# EAGLE board The_QwiicNES-Panel (EAGLE 9.6.2), part 1 of 2
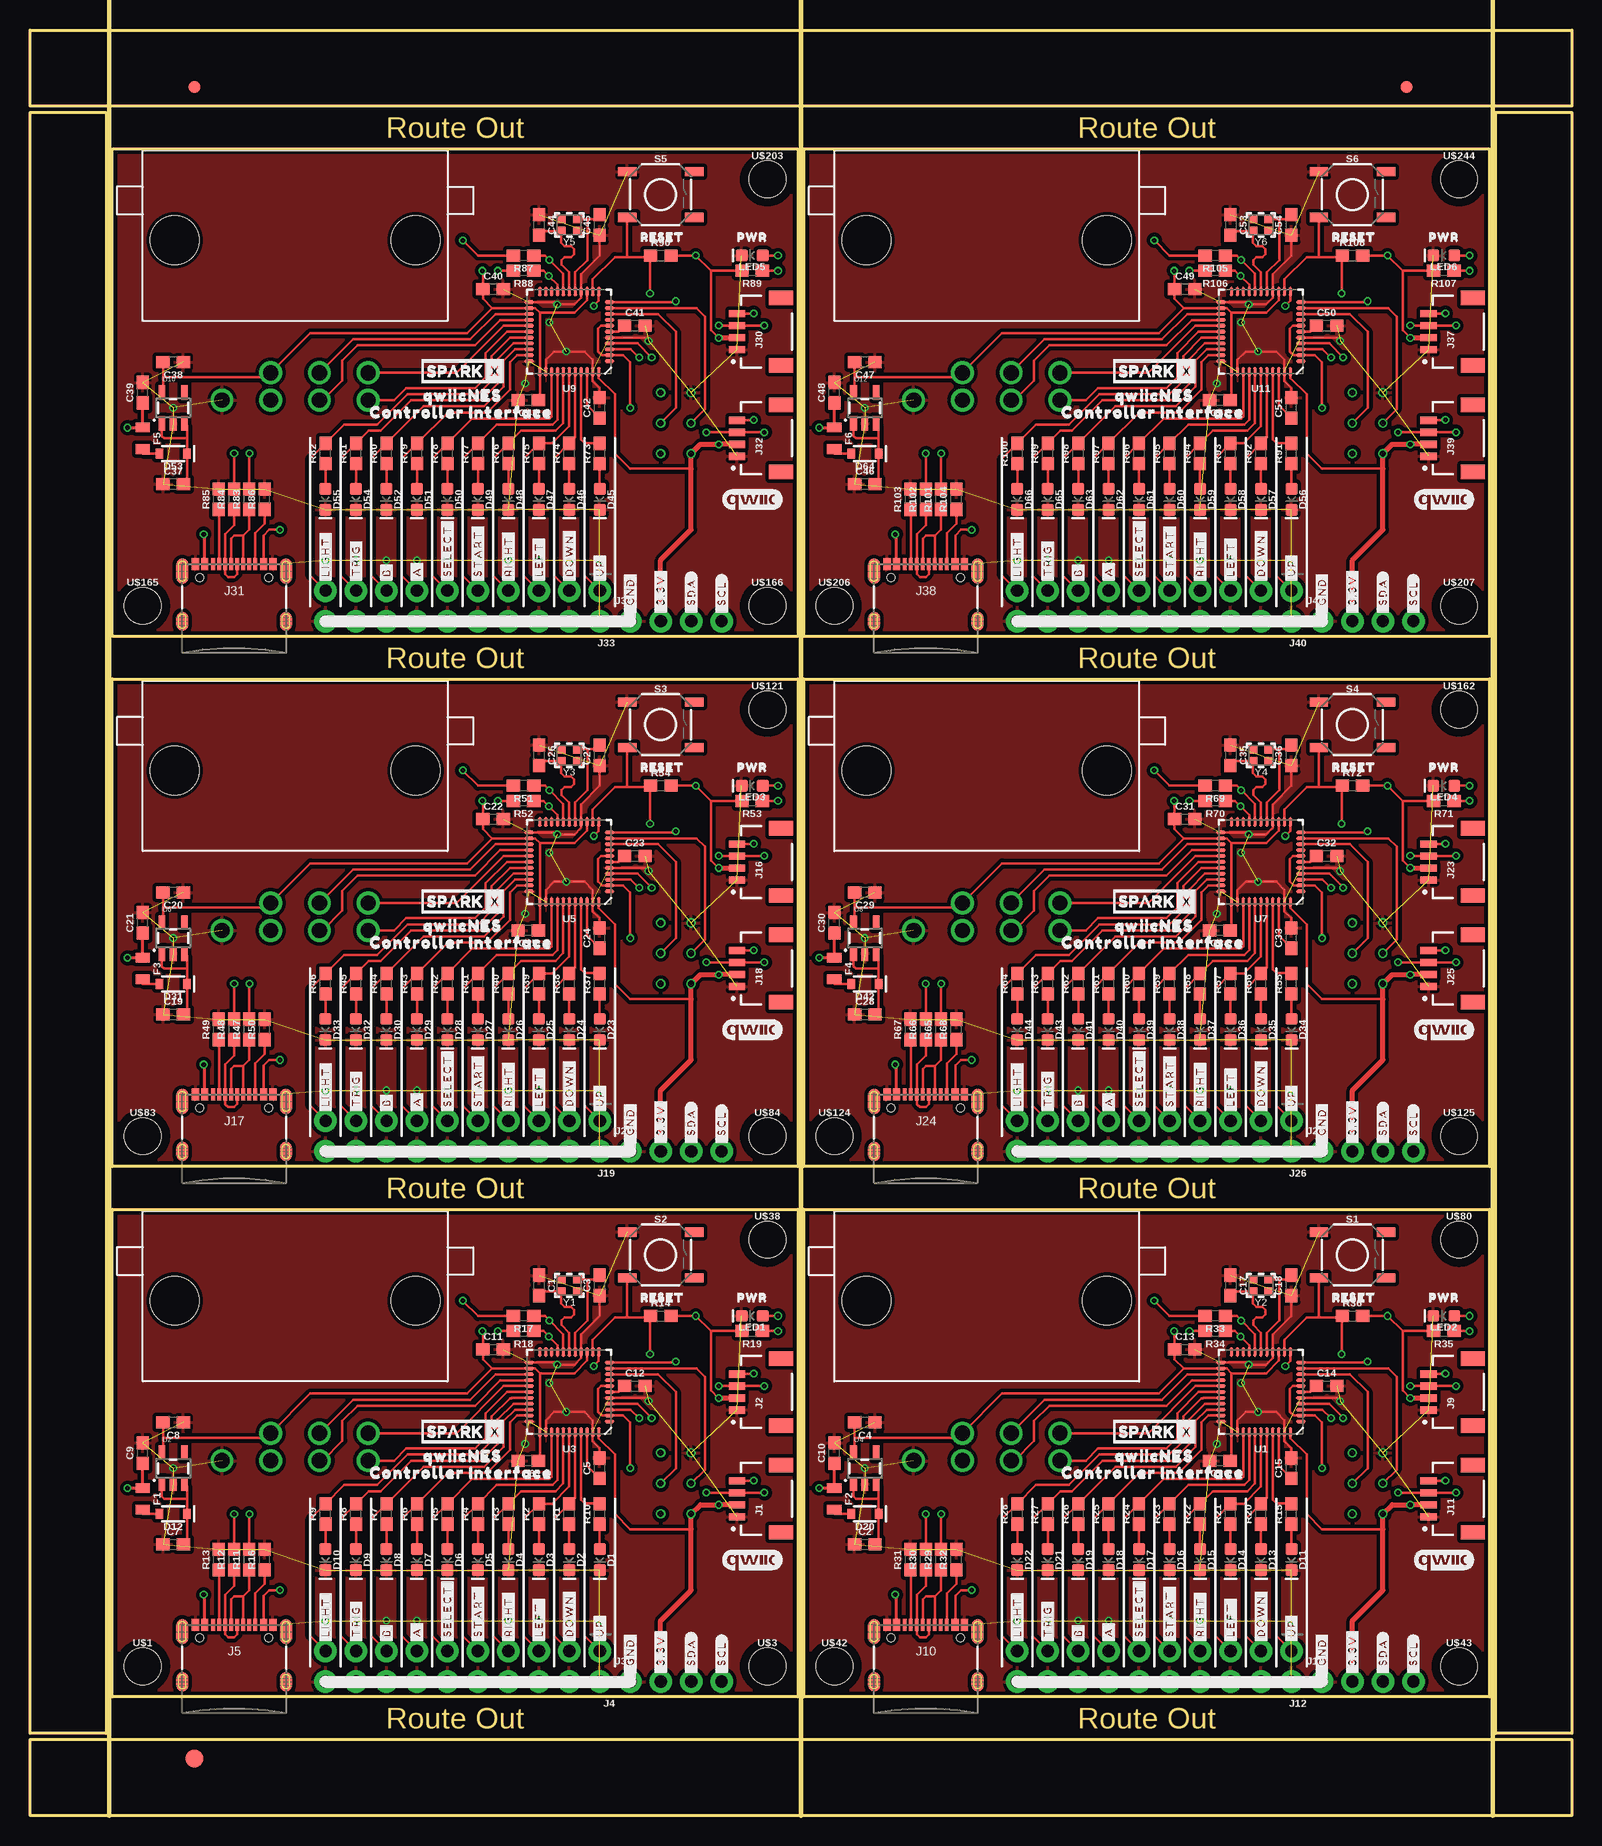
[diagram p0: board, top side]
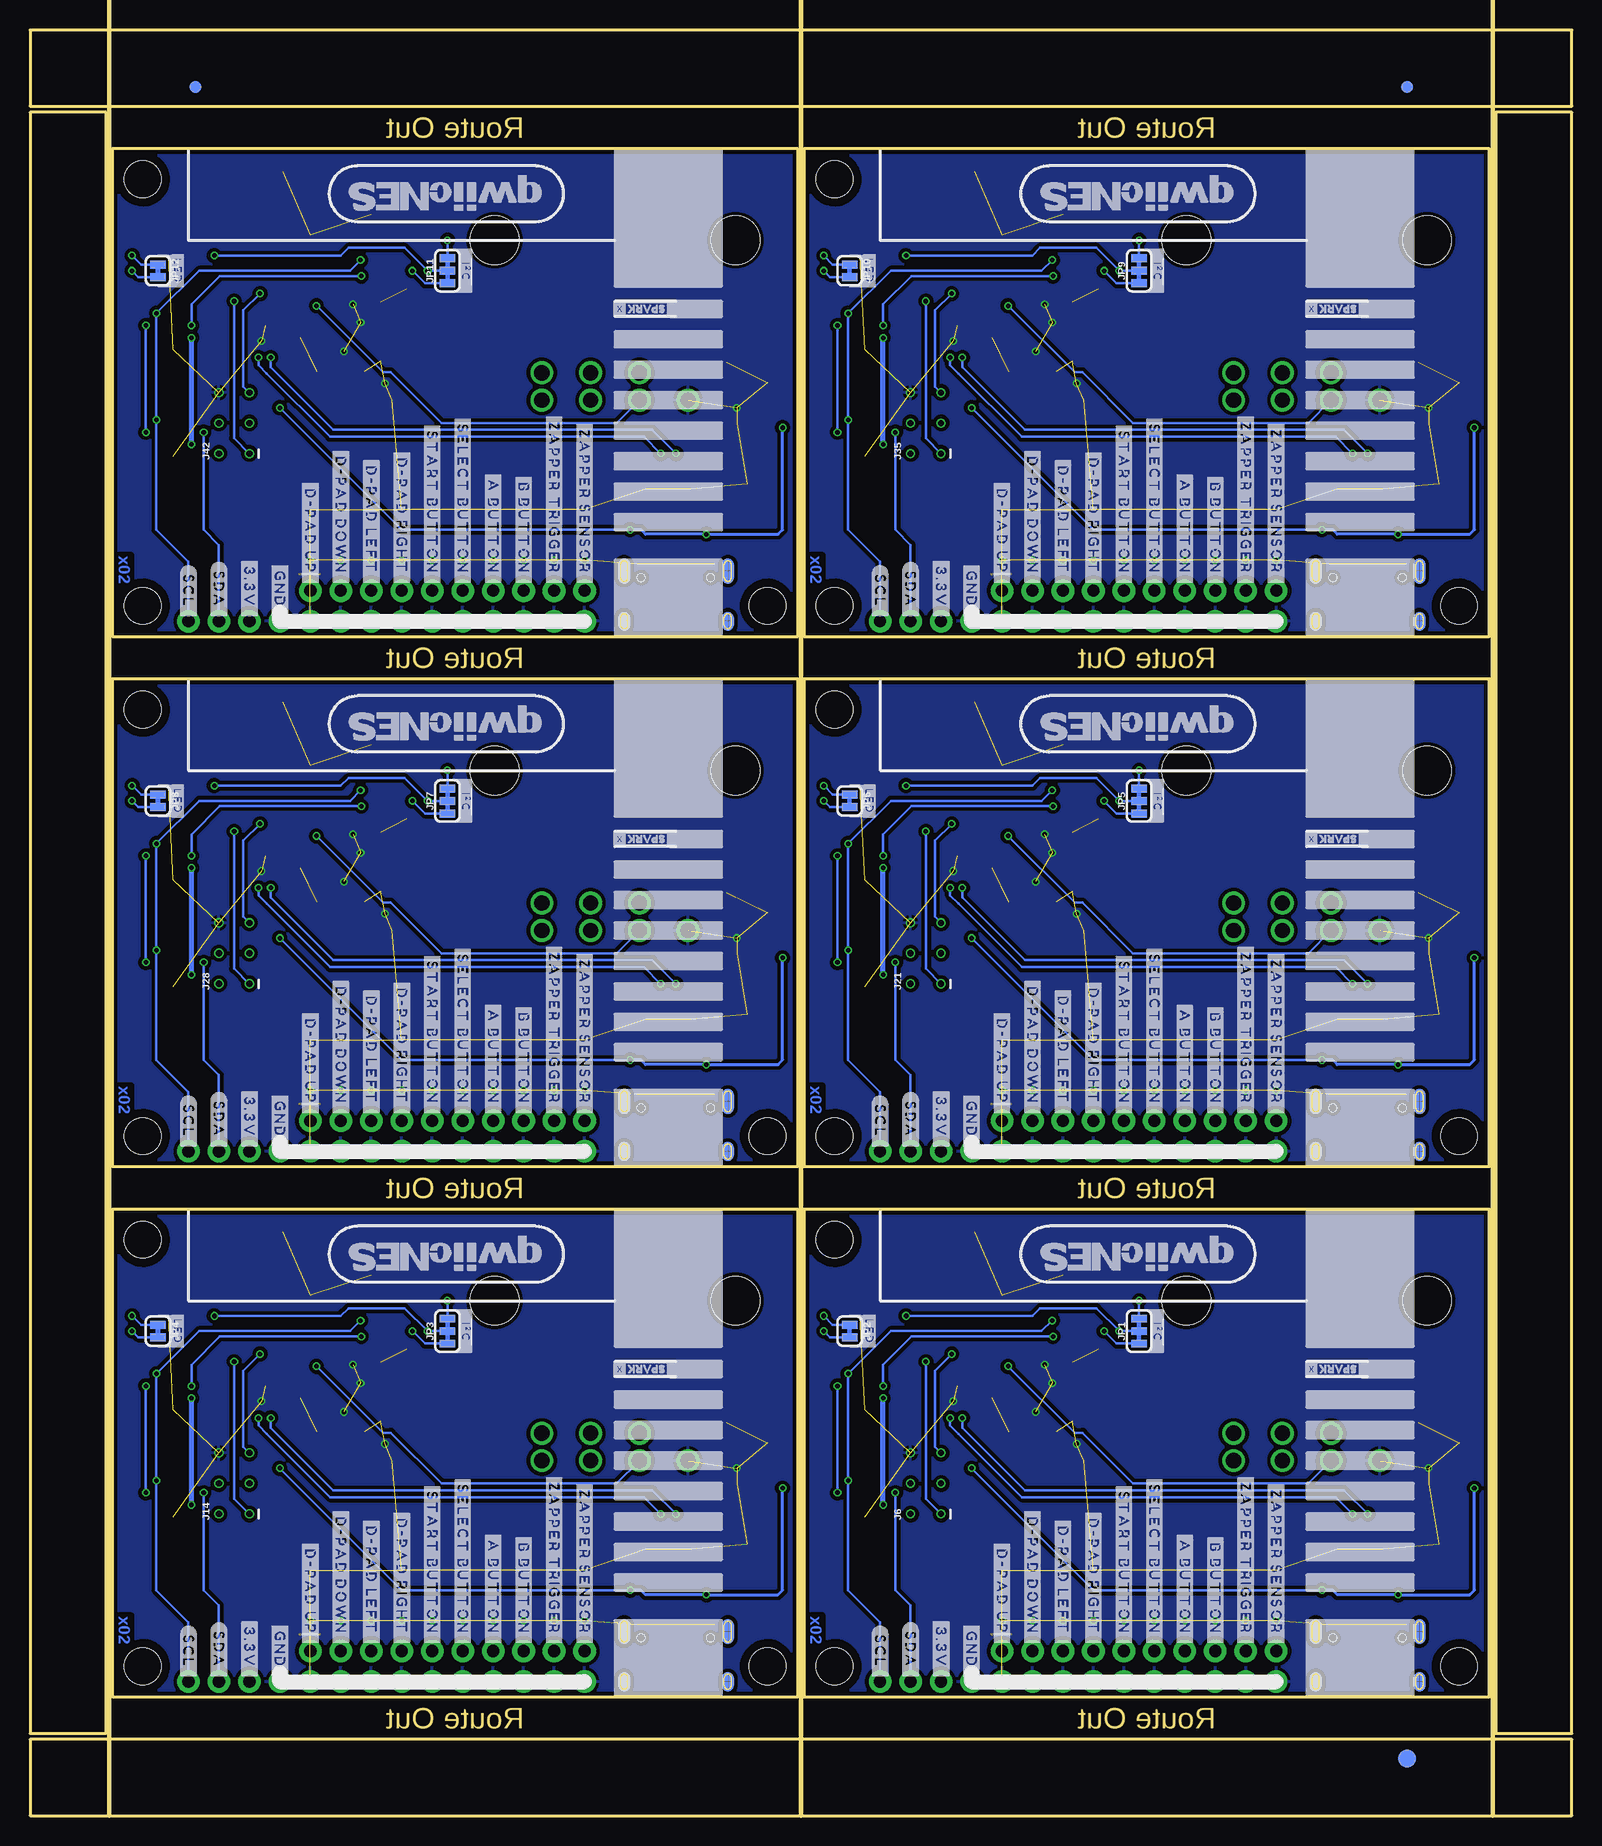
[diagram p1: board, bottom side, seen from below]

Size 128.52 x 148.84 mm. Coordinates in mm from the lower left corner, seen from the top.
Outline: 6.86,9.91 6.86,50.55 64.01,50.55 64.01,9.91 6.86,9.91
Outline: 64.52,9.91 64.52,50.55 121.67,50.55 121.67,9.91 64.52,9.91
Outline: 6.86,54.1 6.86,94.74 64.01,94.74 64.01,54.1 6.86,54.1
Outline: 64.52,54.1 64.52,94.74 121.67,94.74 121.67,54.1 64.52,54.1
Outline: 6.86,98.3 6.86,138.94 64.01,138.94 64.01,98.3 6.86,98.3
Outline: 64.52,98.3 64.52,138.94 121.67,138.94 121.67,98.3 64.52,98.3
Outline: 0,6.35 128.52,6.35 128.52,0 0,0 0,6.35
Outline: 122.17,141.99 128.52,141.99 128.52,6.86 122.17,6.86 122.17,141.99
Outline: 0,148.84 128.52,148.84 128.52,142.49 0,142.49 0,148.84
Outline: 0,141.99 6.35,141.99 6.35,6.86 0,6.86 0,141.99
Copper layers (1*16): Top 0.035mm / dielectric 1.5mm / Bottom 0.035mm
Design rules "The_QwiicNES": minimum track width 5mil, minimum drill 0.3mm, track to track 5mil, track to pad 5mil, pad to pad 5mil, via to via 5mil, smd to smd 5mil, copper to edge 7mil, drill to drill 7mil, minimum pad ring 5mil, minimum via ring 5mil, stop-mask expansion 4mil, vias tented up to drill 25mil, thermal gap 10mil
Net classes: 0 default: width 0 mm, drill 0 mm
Milling: 3 lines

## Footprints (pad centres in the part's own frame; a part is rotated, then mirrored left to right if it is on the bottom)
0603 = smd 1.1 x 1: 1 -0.85,0; 2 0.85,0
LED-0603 = smd 1 x 1: A -0.877,0; C 0.877,0
SOD-323 = smd 0.63 x 0.83: A 1.15,0; C -1.15,0
FIDUCIAL-1X2 = smd 1 x 1: 1 0,0
FIDUCIAL-1.5X3 = smd 1.5 x 1.5: 1 0,0
0805 = smd 0.8 x 1.2: 1 -0.9,0; 2 0.9,0
JST04_1MM_RA = smd 0.6 x 1.35: 1 -1.5,0; 2 -0.5,0; 3 0.5,0; 4 1.5,0 | smd 1.2 x 2: NC1 2.8,-3.675; NC2 -2.8,-3.675
1X04_NO_SILK = drill 1.016 pad 1.88: 1 0,0; 2 2.54,0; 3 5.08,0; 4 7.62,0
2X10_NOSILK = drill 1.016 pad 1.88: 1 0,0; 2 0,2.54; 3 2.54,0; 4 2.54,2.54; 5 5.08,0; 6 5.08,2.54; 7 7.62,0; 8 7.62,2.54; 9 10.16,0; 10 10.16,2.54; 11 12.7,0; 12 12.7,2.54; 13 15.24,0; 14 15.24,2.54; 15 17.78,0; 16 17.78,2.54; 17 20.32,0; 18 20.32,2.54; 19 22.86,0; 20 22.86,2.54
USB-C-16P-5 = smd 0.3 x 1: A5 -1.25,-0.34; A6 -0.25,-0.34; A7 0.25,-0.34; A8 1.25,-0.34; B5 1.75,-0.34; B6 0.75,-0.34; B7 -0.75,-0.34; B8 -1.75,-0.34 | smd 0.6 x 1: GND -3.225,-0.34; GND2 3.225,-0.34; VBUS1 -2.45,-0.34; VBUS2 2.45,-0.34 | smd 1 x 2.1: SHLD1 -4.32,-0.915; SHLD2 4.32,-0.915 | smd 1 x 2.1 bottom: SHLD3 -4.32,-0.915; SHLD4 4.32,-0.915 | smd 1 x 1.6: SHLD5 -4.32,-5.095; SHLD8 4.32,-5.095 | smd 1 x 1.6 bottom: SHLD6 -4.32,-5.095; SHLD7 4.32,-5.095 | hole 0.65: -2.89,-1.445; 2.89,-1.445
2X3_TEST_POINTS = drill 0.508: 1 -2.54,-1.27; 2 -2.54,1.27; 3 0,-1.27; 4 0,1.27; 5 2.54,-1.27; 6 2.54,1.27
NES_CONTROLLER_PORT_7PIN_90 = drill 1.27: 1 -6.096,-13.335; 2 -2.032,-13.335; 3 2.032,-13.335; 4 6.096,-13.335; 5 6.096,-11.049; 6 2.032,-11.049; 7 -2.032,-11.049 | hole 4.064: -10.033,0; 10.033,0
SMT-JUMPER_3_2-NC_TRACE_SILK = smd 0.66 x 1.27: 1 -1.041,0; 2 0,0; 3 1.041,0
SMT-JUMPER_2_NC_TRACE_SILK = smd 0.66 x 1.27: 1 -0.521,0; 2 0.521,0
TACTILE_SWITCH_SMD_5.2MM = smd 1.524 x 0.762: 1 -2.794,1.905; 2 2.794,1.905; 3 -2.794,-1.905; 4 2.794,-1.905
QFN-44-NOPAD_1:1-LESS_PASTE = smd 0.8 x 0.3: 1 -3.337,2.458; 2 -3.337,1.958; 3 -3.337,1.479; 4 -3.337,0.979; 5 -3.337,0.5; 6 -3.337,0; 7 -3.337,-0.5; 8 -3.337,-0.979; 9 -3.337,-1.479; 10 -3.337,-1.958; 11 -3.337,-2.458; 23 3.337,-2.458; 24 3.337,-1.958; 25 3.337,-1.479; 26 3.337,-0.979; 27 3.337,-0.5; 28 3.337,0; 29 3.337,0.5; 30 3.337,0.979; 31 3.337,1.479; 32 3.337,1.958; 33 3.337,2.458 | smd 0.3 x 0.8: 12 -2.458,-3.337; 13 -1.958,-3.337; 14 -1.479,-3.337; 15 -0.979,-3.337; 16 -0.5,-3.337; 17 0,-3.337; 18 0.5,-3.337; 19 0.979,-3.337; 20 1.479,-3.337; 21 1.958,-3.337; 22 2.458,-3.337; 34 2.458,3.337; 35 1.958,3.337; 36 1.479,3.337; 37 0.979,3.337; 38 0.5,3.337; 39 0,3.337; 40 -0.5,3.337; 41 -0.979,3.337; 42 -1.479,3.337; 43 -1.958,3.337; 44 -2.458,3.337
SOT23-5 = smd 0.55 x 1.2: 1 -0.95,-1.3; 2 0,-1.3; 3 0.95,-1.3; 4 0.95,1.3; 5 -0.95,1.3
STAND-OFF-TIGHT = hole 3.048: 0,0
CRYSTAL-SMD-2.0X1.6MM = smd 0.75 x 0.7: 1 -0.675,-0.5; 2 0.675,-0.5; 3 0.675,0.5; 4 -0.675,0.5

## Placement (x,y rotation side)
C1  22pF  [0603]  42.42,44.2 270 top
C2  10uF  [0603]  69.6,22.61 0 top
C3  22pF  [0603]  47.5,44.2 90 top
C4  10uF  [0603]  69.6,32.77 180 top
C5  0.1uF  [0603]  47.5,28.96 90 top
C6  0.1uF  [0603]  41.53,29.59 180 top
C7  10uF  [0603]  11.94,22.61 0 top
C8  10uF  [0603]  11.94,32.77 180 top
C9  1.0uF  [0603]  9.4,30.23 90 top
C10  1.0uF  [0603]  67.06,30.23 90 top
C11  1.0uF  [0603]  38.61,38.86 0 top
C12  1.0uF  [0603]  50.42,35.81 0 top
C13  1.0uF  [0603]  96.27,38.86 0 top
C14  1.0uF  [0603]  108.08,35.81 0 top
C15  0.1uF  [0603]  105.16,28.96 90 top
C16  0.1uF  [0603]  99.19,29.59 180 top
C17  22pF  [0603]  100.08,44.2 270 top
C18  22pF  [0603]  105.16,44.2 90 top
C19  10uF  [0603]  11.94,66.8 0 top
C20  10uF  [0603]  11.94,76.96 180 top
C21  1.0uF  [0603]  9.4,74.42 90 top
C22  1.0uF  [0603]  38.61,83.06 0 top
C23  1.0uF  [0603]  50.42,80.01 0 top
C24  0.1uF  [0603]  47.5,73.15 90 top
C25  0.1uF  [0603]  41.53,73.79 180 top
C26  22pF  [0603]  42.42,88.39 270 top
C27  22pF  [0603]  47.5,88.39 90 top
C28  10uF  [0603]  69.6,66.8 0 top
C29  10uF  [0603]  69.6,76.96 180 top
C30  1.0uF  [0603]  67.06,74.42 90 top
C31  1.0uF  [0603]  96.27,83.06 0 top
C32  1.0uF  [0603]  108.08,80.01 0 top
C33  0.1uF  [0603]  105.16,73.15 90 top
C34  0.1uF  [0603]  99.19,73.79 180 top
C35  22pF  [0603]  100.08,88.39 270 top
C36  22pF  [0603]  105.16,88.39 90 top
C37  10uF  [0603]  11.94,111 0 top
C38  10uF  [0603]  11.94,121.16 180 top
C39  1.0uF  [0603]  9.4,118.62 90 top
C40  1.0uF  [0603]  38.61,127.25 0 top
C41  1.0uF  [0603]  50.42,124.21 0 top
C42  0.1uF  [0603]  47.5,117.35 90 top
C43  0.1uF  [0603]  41.53,117.98 180 top
C44  22pF  [0603]  42.42,132.59 270 top
C45  22pF  [0603]  47.5,132.59 90 top
C46  10uF  [0603]  69.6,111 0 top
C47  10uF  [0603]  69.6,121.16 180 top
C48  1.0uF  [0603]  67.06,118.62 90 top
C49  1.0uF  [0603]  96.27,127.25 0 top
C50  1.0uF  [0603]  108.08,124.21 0 top
C51  0.1uF  [0603]  105.16,117.35 90 top
C52  0.1uF  [0603]  99.19,117.98 180 top
C53  22pF  [0603]  100.08,132.59 270 top
C54  22pF  [0603]  105.16,132.59 90 top
D1  GREEN  [LED-0603]  47.5,21.34 270 top
D2  GREEN  [LED-0603]  44.96,21.34 270 top
D3  GREEN  [LED-0603]  42.42,21.34 270 top
D4  GREEN  [LED-0603]  39.88,21.34 270 top
D5  GREEN  [LED-0603]  37.34,21.34 270 top
D6  GREEN  [LED-0603]  34.8,21.34 270 top
D7  GREEN  [LED-0603]  32.26,21.34 270 top
D8  GREEN  [LED-0603]  29.72,21.34 270 top
D9  GREEN  [LED-0603]  27.18,21.34 270 top
D10  GREEN  [LED-0603]  24.64,21.34 270 top
D11  GREEN  [LED-0603]  105.16,21.34 270 top
D12  3A/10V/280mV  [SOD-323]  11.94,25.15 180 top
D13  GREEN  [LED-0603]  102.62,21.34 270 top
D14  GREEN  [LED-0603]  100.08,21.34 270 top
D15  GREEN  [LED-0603]  97.54,21.34 270 top
D16  GREEN  [LED-0603]  95,21.34 270 top
D17  GREEN  [LED-0603]  92.46,21.34 270 top
D18  GREEN  [LED-0603]  89.92,21.34 270 top
D19  GREEN  [LED-0603]  87.38,21.34 270 top
D20  3A/10V/280mV  [SOD-323]  69.6,25.15 180 top
D21  GREEN  [LED-0603]  84.84,21.34 270 top
D22  GREEN  [LED-0603]  82.3,21.34 270 top
D23  GREEN  [LED-0603]  47.5,65.53 270 top
D24  GREEN  [LED-0603]  44.96,65.53 270 top
D25  GREEN  [LED-0603]  42.42,65.53 270 top
D26  GREEN  [LED-0603]  39.88,65.53 270 top
D27  GREEN  [LED-0603]  37.34,65.53 270 top
D28  GREEN  [LED-0603]  34.8,65.53 270 top
D29  GREEN  [LED-0603]  32.26,65.53 270 top
D30  GREEN  [LED-0603]  29.72,65.53 270 top
D31  3A/10V/280mV  [SOD-323]  11.94,69.34 180 top
D32  GREEN  [LED-0603]  27.18,65.53 270 top
D33  GREEN  [LED-0603]  24.64,65.53 270 top
D34  GREEN  [LED-0603]  105.16,65.53 270 top
D35  GREEN  [LED-0603]  102.62,65.53 270 top
D36  GREEN  [LED-0603]  100.08,65.53 270 top
D37  GREEN  [LED-0603]  97.54,65.53 270 top
D38  GREEN  [LED-0603]  95,65.53 270 top
D39  GREEN  [LED-0603]  92.46,65.53 270 top
D40  GREEN  [LED-0603]  89.92,65.53 270 top
D41  GREEN  [LED-0603]  87.38,65.53 270 top
D42  3A/10V/280mV  [SOD-323]  69.6,69.34 180 top
D43  GREEN  [LED-0603]  84.84,65.53 270 top
D44  GREEN  [LED-0603]  82.3,65.53 270 top
D45  GREEN  [LED-0603]  47.5,109.73 270 top
D46  GREEN  [LED-0603]  44.96,109.73 270 top
D47  GREEN  [LED-0603]  42.42,109.73 270 top
D48  GREEN  [LED-0603]  39.88,109.73 270 top
D49  GREEN  [LED-0603]  37.34,109.73 270 top
D50  GREEN  [LED-0603]  34.8,109.73 270 top
D51  GREEN  [LED-0603]  32.26,109.73 270 top
D52  GREEN  [LED-0603]  29.72,109.73 270 top
D53  3A/10V/280mV  [SOD-323]  11.94,113.54 180 top
D54  GREEN  [LED-0603]  27.18,109.73 270 top
D55  GREEN  [LED-0603]  24.64,109.73 270 top
D56  GREEN  [LED-0603]  105.16,109.73 270 top
D57  GREEN  [LED-0603]  102.62,109.73 270 top
D58  GREEN  [LED-0603]  100.08,109.73 270 top
D59  GREEN  [LED-0603]  97.54,109.73 270 top
D60  GREEN  [LED-0603]  95,109.73 270 top
D61  GREEN  [LED-0603]  92.46,109.73 270 top
D62  GREEN  [LED-0603]  89.92,109.73 270 top
D63  GREEN  [LED-0603]  87.38,109.73 270 top
D64  3A/10V/280mV  [SOD-323]  69.6,113.54 180 top
D65  GREEN  [LED-0603]  84.84,109.73 270 top
D66  GREEN  [LED-0603]  82.3,109.73 270 top
E$1  [FIDUCIAL-1X2]  13.72,144.08 0 top
E$2  [FIDUCIAL-1X2]  13.72,144.08 0 bottom
E$3  [FIDUCIAL-1X2]  114.74,144.08 0 top
E$4  [FIDUCIAL-1X2]  114.74,144.08 0 bottom
E$5  [FIDUCIAL-1.5X3]  13.72,4.76 0 top
E$6  [FIDUCIAL-1.5X3]  13.72,4.76 0 bottom
F1  6V 0.5A  [0805]  9.4,26.42 270 top
F2  6V 0.5A  [0805]  67.06,26.42 270 top
F3  6V 0.5A  [0805]  9.4,70.61 270 top
F4  6V 0.5A  [0805]  67.06,70.61 270 top
F5  6V 0.5A  [0805]  9.4,114.81 270 top
F6  6V 0.5A  [0805]  67.06,114.81 270 top
J1  QWIIC_RIGHT_ANGLE  [JST04_1MM_RA]  58.93,26.42 90 top
J2  QWIIC_RIGHT_ANGLE  [JST04_1MM_RA]  58.93,35.31 90 top
J3  [1X04_NO_SILK]  50.04,11.18 0 top
J4  [2X10_NOSILK]  47.5,13.72 180 top
J5  [USB-C-16P-5]  17.02,16.26 0 top
J6  AVR_SPI_PROG_3X2TESTPOINTS  [2X3_TEST_POINTS]  53.85,27.69 90 bottom
J7  NES_CONTROLLER_PORT  [NES_CONTROLLER_PORT_7PIN_90]  22.1,42.93 0 top
J8  NES_CONTROLLER_PORT  [NES_CONTROLLER_PORT_7PIN_90]  79.76,42.93 0 top
J9  QWIIC_RIGHT_ANGLE  [JST04_1MM_RA]  116.59,35.31 90 top
J10  [USB-C-16P-5]  74.68,16.26 0 top
J11  QWIIC_RIGHT_ANGLE  [JST04_1MM_RA]  116.59,26.42 90 top
J12  [2X10_NOSILK]  105.16,13.72 180 top
J13  [1X04_NO_SILK]  107.7,11.18 0 top
J14  AVR_SPI_PROG_3X2TESTPOINTS  [2X3_TEST_POINTS]  111.51,27.69 90 bottom
J15  NES_CONTROLLER_PORT  [NES_CONTROLLER_PORT_7PIN_90]  22.1,87.12 0 top
J16  QWIIC_RIGHT_ANGLE  [JST04_1MM_RA]  58.93,79.5 90 top
J17  [USB-C-16P-5]  17.02,60.45 0 top
J18  QWIIC_RIGHT_ANGLE  [JST04_1MM_RA]  58.93,70.61 90 top
J19  [2X10_NOSILK]  47.5,57.91 180 top
J20  [1X04_NO_SILK]  50.04,55.37 0 top
J21  AVR_SPI_PROG_3X2TESTPOINTS  [2X3_TEST_POINTS]  53.85,71.88 90 bottom
J22  NES_CONTROLLER_PORT  [NES_CONTROLLER_PORT_7PIN_90]  79.76,87.12 0 top
J23  QWIIC_RIGHT_ANGLE  [JST04_1MM_RA]  116.59,79.5 90 top
J24  [USB-C-16P-5]  74.68,60.45 0 top
J25  QWIIC_RIGHT_ANGLE  [JST04_1MM_RA]  116.59,70.61 90 top
J26  [2X10_NOSILK]  105.16,57.91 180 top
J27  [1X04_NO_SILK]  107.7,55.37 0 top
J28  AVR_SPI_PROG_3X2TESTPOINTS  [2X3_TEST_POINTS]  111.51,71.88 90 bottom
J29  NES_CONTROLLER_PORT  [NES_CONTROLLER_PORT_7PIN_90]  22.1,131.32 0 top
J30  QWIIC_RIGHT_ANGLE  [JST04_1MM_RA]  58.93,123.7 90 top
J31  [USB-C-16P-5]  17.02,104.65 0 top
J32  QWIIC_RIGHT_ANGLE  [JST04_1MM_RA]  58.93,114.81 90 top
J33  [2X10_NOSILK]  47.5,102.11 180 top
J34  [1X04_NO_SILK]  50.04,99.57 0 top
J35  AVR_SPI_PROG_3X2TESTPOINTS  [2X3_TEST_POINTS]  53.85,116.08 90 bottom
J36  NES_CONTROLLER_PORT  [NES_CONTROLLER_PORT_7PIN_90]  79.76,131.32 0 top
J37  QWIIC_RIGHT_ANGLE  [JST04_1MM_RA]  116.59,123.7 90 top
J38  [USB-C-16P-5]  74.68,104.65 0 top
J39  QWIIC_RIGHT_ANGLE  [JST04_1MM_RA]  116.59,114.81 90 top
J40  [2X10_NOSILK]  105.16,102.11 180 top
J41  [1X04_NO_SILK]  107.7,99.57 0 top
J42  AVR_SPI_PROG_3X2TESTPOINTS  [2X3_TEST_POINTS]  111.51,116.08 90 bottom
JP1  JUMPER-SMT_3_2-NC_TRACE_SILK  [SMT-JUMPER_3_2-NC_TRACE_SILK]  36.07,40.39 90 bottom
JP2  JUMPER-SMT_2_NC_TRACE_SILK  [SMT-JUMPER_2_NC_TRACE_SILK]  60.2,40.39 270 bottom
JP3  JUMPER-SMT_3_2-NC_TRACE_SILK  [SMT-JUMPER_3_2-NC_TRACE_SILK]  93.73,40.39 90 bottom
JP4  JUMPER-SMT_2_NC_TRACE_SILK  [SMT-JUMPER_2_NC_TRACE_SILK]  117.86,40.39 270 bottom
JP5  JUMPER-SMT_3_2-NC_TRACE_SILK  [SMT-JUMPER_3_2-NC_TRACE_SILK]  36.07,84.58 90 bottom
JP6  JUMPER-SMT_2_NC_TRACE_SILK  [SMT-JUMPER_2_NC_TRACE_SILK]  60.2,84.58 270 bottom
JP7  JUMPER-SMT_3_2-NC_TRACE_SILK  [SMT-JUMPER_3_2-NC_TRACE_SILK]  93.73,84.58 90 bottom
JP8  JUMPER-SMT_2_NC_TRACE_SILK  [SMT-JUMPER_2_NC_TRACE_SILK]  117.86,84.58 270 bottom
JP9  JUMPER-SMT_3_2-NC_TRACE_SILK  [SMT-JUMPER_3_2-NC_TRACE_SILK]  36.07,128.78 90 bottom
JP10  JUMPER-SMT_2_NC_TRACE_SILK  [SMT-JUMPER_2_NC_TRACE_SILK]  60.2,128.78 270 bottom
JP11  JUMPER-SMT_3_2-NC_TRACE_SILK  [SMT-JUMPER_3_2-NC_TRACE_SILK]  93.73,128.78 90 bottom
JP12  JUMPER-SMT_2_NC_TRACE_SILK  [SMT-JUMPER_2_NC_TRACE_SILK]  117.86,128.78 270 bottom
LED1  RED  [LED-0603]  60.2,41.66 180 top
LED2  RED  [LED-0603]  117.86,41.66 180 top
LED3  RED  [LED-0603]  60.2,85.85 180 top
LED4  RED  [LED-0603]  117.86,85.85 180 top
LED5  RED  [LED-0603]  60.2,130.05 180 top
LED6  RED  [LED-0603]  117.86,130.05 180 top
R1  1k  [0603]  44.96,25.15 90 top
R2  1k  [0603]  42.42,25.15 90 top
R3  1k  [0603]  39.88,25.15 90 top
R4  1k  [0603]  37.34,25.15 90 top
R5  1k  [0603]  34.8,25.15 90 top
R6  1k  [0603]  32.26,25.15 90 top
R7  1k  [0603]  29.72,25.15 90 top
R8  1k  [0603]  27.18,25.15 90 top
R9  1k  [0603]  24.64,25.15 90 top
R10  1k  [0603]  47.5,25.15 90 top
R11  22  [0603]  18.29,21.34 90 top
R12  22  [0603]  17.02,21.34 90 top
R13  5.1k  [0603]  15.75,21.34 90 top
R14  10k  [0603]  52.58,41.66 0 top
R15  1k  [0603]  105.16,25.15 90 top
R16  5.1k  [0603]  19.56,21.34 90 top
R17  2.2k  [0603]  41.15,41.66 180 top
R18  2.2k  [0603]  41.15,40.39 180 top
R19  1k  [0603]  60.2,40.39 180 top
R20  1k  [0603]  102.62,25.15 90 top
R21  1k  [0603]  100.08,25.15 90 top
R22  1k  [0603]  97.54,25.15 90 top
R23  1k  [0603]  95,25.15 90 top
R24  1k  [0603]  92.46,25.15 90 top
R25  1k  [0603]  89.92,25.15 90 top
R26  1k  [0603]  87.38,25.15 90 top
R27  1k  [0603]  84.84,25.15 90 top
R28  1k  [0603]  82.3,25.15 90 top
R29  22  [0603]  75.95,21.34 90 top
R30  22  [0603]  74.68,21.34 90 top
R31  5.1k  [0603]  73.41,21.34 90 top
R32  5.1k  [0603]  77.22,21.34 90 top
R33  2.2k  [0603]  98.81,41.66 180 top
R34  2.2k  [0603]  98.81,40.39 180 top
R35  1k  [0603]  117.86,40.39 180 top
R36  10k  [0603]  110.24,41.66 0 top
R37  1k  [0603]  47.5,69.34 90 top
R38  1k  [0603]  44.96,69.34 90 top
R39  1k  [0603]  42.42,69.34 90 top
R40  1k  [0603]  39.88,69.34 90 top
R41  1k  [0603]  37.34,69.34 90 top
R42  1k  [0603]  34.8,69.34 90 top
R43  1k  [0603]  32.26,69.34 90 top
R44  1k  [0603]  29.72,69.34 90 top
R45  1k  [0603]  27.18,69.34 90 top
R46  1k  [0603]  24.64,69.34 90 top
R47  22  [0603]  18.29,65.53 90 top
R48  22  [0603]  17.02,65.53 90 top
R49  5.1k  [0603]  15.75,65.53 90 top
R50  5.1k  [0603]  19.56,65.53 90 top
R51  2.2k  [0603]  41.15,85.85 180 top
R52  2.2k  [0603]  41.15,84.58 180 top
R53  1k  [0603]  60.2,84.58 180 top
R54  10k  [0603]  52.58,85.85 0 top
R55  1k  [0603]  105.16,69.34 90 top
R56  1k  [0603]  102.62,69.34 90 top
R57  1k  [0603]  100.08,69.34 90 top
R58  1k  [0603]  97.54,69.34 90 top
R59  1k  [0603]  95,69.34 90 top
R60  1k  [0603]  92.46,69.34 90 top
R61  1k  [0603]  89.92,69.34 90 top
R62  1k  [0603]  87.38,69.34 90 top
R63  1k  [0603]  84.84,69.34 90 top
R64  1k  [0603]  82.3,69.34 90 top
R65  22  [0603]  75.95,65.53 90 top
R66  22  [0603]  74.68,65.53 90 top
R67  5.1k  [0603]  73.41,65.53 90 top
R68  5.1k  [0603]  77.22,65.53 90 top
R69  2.2k  [0603]  98.81,85.85 180 top
R70  2.2k  [0603]  98.81,84.58 180 top
R71  1k  [0603]  117.86,84.58 180 top
R72  10k  [0603]  110.24,85.85 0 top
R73  1k  [0603]  47.5,113.54 90 top
R74  1k  [0603]  44.96,113.54 90 top
R75  1k  [0603]  42.42,113.54 90 top
R76  1k  [0603]  39.88,113.54 90 top
R77  1k  [0603]  37.34,113.54 90 top
R78  1k  [0603]  34.8,113.54 90 top
R79  1k  [0603]  32.26,113.54 90 top
R80  1k  [0603]  29.72,113.54 90 top
R81  1k  [0603]  27.18,113.54 90 top
R82  1k  [0603]  24.64,113.54 90 top
R83  22  [0603]  18.29,109.73 90 top
R84  22  [0603]  17.02,109.73 90 top
R85  5.1k  [0603]  15.75,109.73 90 top
R86  5.1k  [0603]  19.56,109.73 90 top
R87  2.2k  [0603]  41.15,130.05 180 top
R88  2.2k  [0603]  41.15,128.78 180 top
R89  1k  [0603]  60.2,128.78 180 top
R90  10k  [0603]  52.58,130.05 0 top
R91  1k  [0603]  105.16,113.54 90 top
R92  1k  [0603]  102.62,113.54 90 top
R93  1k  [0603]  100.08,113.54 90 top
R94  1k  [0603]  97.54,113.54 90 top
R95  1k  [0603]  95,113.54 90 top
R96  1k  [0603]  92.46,113.54 90 top
R97  1k  [0603]  89.92,113.54 90 top
R98  1k  [0603]  87.38,113.54 90 top
R99  1k  [0603]  84.84,113.54 90 top
R100  1k  [0603]  82.3,113.54 90 top
R101  22  [0603]  75.95,109.73 90 top
R102  22  [0603]  74.68,109.73 90 top
R103  5.1k  [0603]  73.41,109.73 90 top
R104  5.1k  [0603]  77.22,109.73 90 top
R105  2.2k  [0603]  98.81,130.05 180 top
R106  2.2k  [0603]  98.81,128.78 180 top
R107  1k  [0603]  117.86,128.78 180 top
R108  10k  [0603]  110.24,130.05 0 top
S1  MOMENTARY-SWITCH-SPST-SMD-5.2MM-TALL  [TACTILE_SWITCH_SMD_5.2MM]  110.24,46.74 0 top
S2  MOMENTARY-SWITCH-SPST-SMD-5.2MM-TALL  [TACTILE_SWITCH_SMD_5.2MM]  52.58,46.74 0 top
S3  MOMENTARY-SWITCH-SPST-SMD-5.2MM-TALL  [TACTILE_SWITCH_SMD_5.2MM]  52.58,90.93 0 top
S4  MOMENTARY-SWITCH-SPST-SMD-5.2MM-TALL  [TACTILE_SWITCH_SMD_5.2MM]  110.24,90.93 0 top
S5  MOMENTARY-SWITCH-SPST-SMD-5.2MM-TALL  [TACTILE_SWITCH_SMD_5.2MM]  52.58,135.13 0 top
S6  MOMENTARY-SWITCH-SPST-SMD-5.2MM-TALL  [TACTILE_SWITCH_SMD_5.2MM]  110.24,135.13 0 top
U1  32U4  [QFN-44-NOPAD_1:1-LESS_PASTE]  102.62,35.31 180 top
U2  3.3V  [SOT23-5]  11.94,28.96 0 top
U3  32U4  [QFN-44-NOPAD_1:1-LESS_PASTE]  44.96,35.31 180 top
U4  3.3V  [SOT23-5]  69.6,28.96 0 top
U5  32U4  [QFN-44-NOPAD_1:1-LESS_PASTE]  44.96,79.5 180 top
U6  3.3V  [SOT23-5]  11.94,73.15 0 top
U7  32U4  [QFN-44-NOPAD_1:1-LESS_PASTE]  102.62,79.5 180 top
U8  3.3V  [SOT23-5]  69.6,73.15 0 top
U9  32U4  [QFN-44-NOPAD_1:1-LESS_PASTE]  44.96,123.7 180 top
U10  3.3V  [SOT23-5]  11.94,117.35 0 top
U11  32U4  [QFN-44-NOPAD_1:1-LESS_PASTE]  102.62,123.7 180 top
U12  3.3V  [SOT23-5]  69.6,117.35 0 top
U$1  [STAND-OFF-TIGHT]  9.4,12.45 0 top
U$2  [SPARKX-SMALL]  36.07,32 0 top
U$3  [STAND-OFF-TIGHT]  61.47,12.45 0 top
U$4  [#LIGHT#0]  24.64,14.35 90 top
U$5  [#TRIG#0]  27.18,14.35 90 top
U$6  [#B#0]  29.72,14.35 90 top
U$7  [#A#0]  32.26,14.35 90 top
U$8  [#SELECT#0]  34.8,14.35 90 top
U$9  [#START#0]  37.34,14.35 90 top
U$10  [#RIGHT#0]  39.88,14.35 90 top
U$11  [#LEFT#0]  42.42,14.35 90 top
U$12  [#DOWN#0]  44.96,14.35 90 top
U$13  [#UP#0]  47.5,14.35 90 top
U$14  [#_GND#0]  50.04,11.68 90 top
U$15  [#_SDA#0]  55.12,11.68 90 top
U$16  [#_SCL#0]  57.66,11.68 90 top
U$17  [#_3#3V#0]  52.58,11.68 90 top
U$18  [PWR0]  60.2,43.18 0 top
U$19  [RESET0]  52.7,43.18 0 top
U$20  [SPARKX-TINY]  19.94,37.21 180 bottom
U$21  [#ZAPPER_SENSOR_#0]  24.64,14.1 270 bottom
U$22  [#ZAPPER_TRIGGER_#0]  27.18,14.1 270 bottom
U$23  [#B_BUTTON_#0]  29.72,14.1 270 bottom
U$24  [#A_BUTTON_#0]  32.26,14.1 270 bottom
U$25  [#SELECT_BUTTON_#0]  34.8,14.1 270 bottom
U$26  [#START_BUTTON_#0]  37.34,14.1 270 bottom
U$27  [#D#PAD_RIGHT_#0]  39.88,14.1 270 bottom
U$28  [#D#PAD_LEFT_#0]  42.42,14.1 270 bottom
U$29  [#D#PAD_DOWN_#0]  44.96,14.1 270 bottom
U$30  [#D#PAD_UP_#0]  47.5,14.1 270 bottom
U$31  [#GND_#0]  50.04,11.3 270 bottom
U$32  [#SDA_#0]  55.12,11.3 270 bottom
U$33  [#SCL_#0]  57.66,11.3 270 bottom
U$34  [#3#3V_#0]  52.58,11.3 270 bottom
U$35  [#I�C#0]  34.54,38.99 270 bottom
U$36  [#LED#0]  58.55,40.39 270 bottom
U$37  [QWIICNESS#PNG]  36.07,46.74 180 bottom
U$38  [STAND-OFF-TIGHT]  61.47,48.01 0 top
U$39  [QWIICNES0]  36.07,29.97 0 top
U$40  [CONTROLLER_INTERFACE0]  35.94,28.58 0 top
U$41  [QWIIC_5MM]  60.2,21.34 0 top
U$42  [STAND-OFF-TIGHT]  67.06,12.45 0 top
U$43  [STAND-OFF-TIGHT]  119.13,12.45 0 top
U$44  [#LIGHT#0]  82.3,14.35 90 top
U$45  [#TRIG#0]  84.84,14.35 90 top
U$46  [#B#0]  87.38,14.35 90 top
U$47  [#A#0]  89.92,14.35 90 top
U$48  [#SELECT#0]  92.46,14.35 90 top
U$49  [#START#0]  95,14.35 90 top
U$50  [#RIGHT#0]  97.54,14.35 90 top
U$51  [#LEFT#0]  100.08,14.35 90 top
U$52  [#DOWN#0]  102.62,14.35 90 top
U$53  [#UP#0]  105.16,14.35 90 top
U$54  [#_SDA#0]  112.78,11.68 90 top
U$55  [#_SCL#0]  115.32,11.68 90 top
U$56  [#_3#3V#0]  110.24,11.68 90 top
U$57  [PWR0]  117.86,43.18 0 top
U$58  [RESET0]  110.36,43.18 0 top
U$59  [#_GND#0]  107.7,11.68 90 top
U$60  [#ZAPPER_SENSOR_#0]  82.3,14.1 270 bottom
U$61  [#ZAPPER_TRIGGER_#0]  84.84,14.1 270 bottom
U$62  [#B_BUTTON_#0]  87.38,14.1 270 bottom
U$63  [#A_BUTTON_#0]  89.92,14.1 270 bottom
U$64  [#SELECT_BUTTON_#0]  92.46,14.1 270 bottom
U$65  [#START_BUTTON_#0]  95,14.1 270 bottom
U$66  [#D#PAD_RIGHT_#0]  97.54,14.1 270 bottom
U$67  [#D#PAD_LEFT_#0]  100.08,14.1 270 bottom
U$68  [#D#PAD_DOWN_#0]  102.62,14.1 270 bottom
U$69  [#D#PAD_UP_#0]  105.16,14.1 270 bottom
U$70  [#GND_#0]  107.7,11.3 270 bottom
U$71  [#SDA_#0]  112.78,11.3 270 bottom
U$72  [#SCL_#0]  115.32,11.3 270 bottom
U$73  [#3#3V_#0]  110.24,11.3 270 bottom
U$74  [#I�C#0]  92.2,38.99 270 bottom
U$75  [SPARKX-TINY]  77.6,37.21 180 bottom
U$76  [QWIICNESS#PNG]  93.73,46.74 180 bottom
U$77  [QWIICNES0]  93.73,29.97 0 top
U$78  [CONTROLLER_INTERFACE0]  93.6,28.58 0 top
U$79  [SPARKX-SMALL]  93.73,32 0 top
U$80  [STAND-OFF-TIGHT]  119.13,48.01 0 top
U$81  [QWIIC_5MM]  117.86,21.34 0 top
U$82  [#LED#0]  116.2,40.39 270 bottom
U$83  [STAND-OFF-TIGHT]  9.4,56.64 0 top
U$84  [STAND-OFF-TIGHT]  61.47,56.64 0 top
U$85  [#LIGHT#0]  24.64,58.55 90 top
U$86  [#TRIG#0]  27.18,58.55 90 top
U$87  [#B#0]  29.72,58.55 90 top
U$88  [#A#0]  32.26,58.55 90 top
U$89  [#SELECT#0]  34.8,58.55 90 top
U$90  [#START#0]  37.34,58.55 90 top
U$91  [#RIGHT#0]  39.88,58.55 90 top
U$92  [#LEFT#0]  42.42,58.55 90 top
U$93  [#DOWN#0]  44.96,58.55 90 top
U$94  [#UP#0]  47.5,58.55 90 top
U$95  [#_SDA#0]  55.12,55.88 90 top
U$96  [#_SCL#0]  57.66,55.88 90 top
U$97  [#_3#3V#0]  52.58,55.88 90 top
U$98  [PWR0]  60.2,87.38 0 top
U$99  [RESET0]  52.7,87.38 0 top
U$100  [#_GND#0]  50.04,55.88 90 top
U$101  [#ZAPPER_SENSOR_#0]  24.64,58.29 270 bottom
U$102  [#ZAPPER_TRIGGER_#0]  27.18,58.29 270 bottom
U$103  [#B_BUTTON_#0]  29.72,58.29 270 bottom
U$104  [#A_BUTTON_#0]  32.26,58.29 270 bottom
U$105  [#SELECT_BUTTON_#0]  34.8,58.29 270 bottom
U$106  [#START_BUTTON_#0]  37.34,58.29 270 bottom
U$107  [#D#PAD_RIGHT_#0]  39.88,58.29 270 bottom
U$108  [#D#PAD_LEFT_#0]  42.42,58.29 270 bottom
U$109  [#D#PAD_DOWN_#0]  44.96,58.29 270 bottom
U$110  [#D#PAD_UP_#0]  47.5,58.29 270 bottom
U$111  [#GND_#0]  50.04,55.5 270 bottom
U$112  [#SDA_#0]  55.12,55.5 270 bottom
U$113  [#SCL_#0]  57.66,55.5 270 bottom
U$114  [#3#3V_#0]  52.58,55.5 270 bottom
U$115  [#I�C#0]  34.54,83.19 270 bottom
U$116  [SPARKX-TINY]  19.94,81.41 180 bottom
U$117  [QWIICNESS#PNG]  36.07,90.93 180 bottom
U$118  [QWIICNES0]  36.07,74.17 0 top
U$119  [CONTROLLER_INTERFACE0]  35.94,72.77 0 top
U$120  [SPARKX-SMALL]  36.07,76.2 0 top
U$121  [STAND-OFF-TIGHT]  61.47,92.2 0 top
U$122  [QWIIC_5MM]  60.2,65.53 0 top
U$123  [#LED#0]  58.55,84.58 270 bottom
U$124  [STAND-OFF-TIGHT]  67.06,56.64 0 top
U$125  [STAND-OFF-TIGHT]  119.13,56.64 0 top
U$126  [#LIGHT#0]  82.3,58.55 90 top
U$127  [#TRIG#0]  84.84,58.55 90 top
U$128  [#B#0]  87.38,58.55 90 top
U$129  [#A#0]  89.92,58.55 90 top
U$130  [#SELECT#0]  92.46,58.55 90 top
U$131  [#START#0]  95,58.55 90 top
U$132  [#RIGHT#0]  97.54,58.55 90 top
U$133  [#LEFT#0]  100.08,58.55 90 top
U$134  [#DOWN#0]  102.62,58.55 90 top
U$135  [#UP#0]  105.16,58.55 90 top
U$136  [#_SDA#0]  112.78,55.88 90 top
U$137  [#_SCL#0]  115.32,55.88 90 top
U$138  [#_3#3V#0]  110.24,55.88 90 top
U$139  [PWR0]  117.86,87.38 0 top
U$140  [RESET0]  110.36,87.38 0 top
U$141  [#_GND#0]  107.7,55.88 90 top
U$142  [#ZAPPER_SENSOR_#0]  82.3,58.29 270 bottom
U$143  [#ZAPPER_TRIGGER_#0]  84.84,58.29 270 bottom
U$144  [#B_BUTTON_#0]  87.38,58.29 270 bottom
U$145  [#A_BUTTON_#0]  89.92,58.29 270 bottom
U$146  [#SELECT_BUTTON_#0]  92.46,58.29 270 bottom
U$147  [#START_BUTTON_#0]  95,58.29 270 bottom
U$148  [#D#PAD_RIGHT_#0]  97.54,58.29 270 bottom
U$149  [#D#PAD_LEFT_#0]  100.08,58.29 270 bottom
U$150  [#D#PAD_DOWN_#0]  102.62,58.29 270 bottom
U$151  [#D#PAD_UP_#0]  105.16,58.29 270 bottom
U$152  [#GND_#0]  107.7,55.5 270 bottom
U$153  [#SDA_#0]  112.78,55.5 270 bottom
U$154  [#SCL_#0]  115.32,55.5 270 bottom
U$155  [#3#3V_#0]  110.24,55.5 270 bottom
U$156  [#I�C#0]  92.2,83.19 270 bottom
U$157  [SPARKX-TINY]  77.6,81.41 180 bottom
U$158  [QWIICNESS#PNG]  93.73,90.93 180 bottom
U$159  [QWIICNES0]  93.73,74.17 0 top
U$160  [CONTROLLER_INTERFACE0]  93.6,72.77 0 top
U$161  [SPARKX-SMALL]  93.73,76.2 0 top
U$162  [STAND-OFF-TIGHT]  119.13,92.2 0 top
U$163  [QWIIC_5MM]  117.86,65.53 0 top
U$164  [#LED#0]  116.2,84.58 270 bottom
U$165  [STAND-OFF-TIGHT]  9.4,100.84 0 top
U$166  [STAND-OFF-TIGHT]  61.47,100.84 0 top
U$167  [#LIGHT#0]  24.64,102.74 90 top
U$168  [#TRIG#0]  27.18,102.74 90 top
U$169  [#B#0]  29.72,102.74 90 top
U$170  [#A#0]  32.26,102.74 90 top
U$171  [#SELECT#0]  34.8,102.74 90 top
U$172  [#START#0]  37.34,102.74 90 top
U$173  [#RIGHT#0]  39.88,102.74 90 top
U$174  [#LEFT#0]  42.42,102.74 90 top
U$175  [#DOWN#0]  44.96,102.74 90 top
U$176  [#UP#0]  47.5,102.74 90 top
U$177  [#_SDA#0]  55.12,100.08 90 top
U$178  [#_SCL#0]  57.66,100.08 90 top
U$179  [#_3#3V#0]  52.58,100.08 90 top
U$180  [PWR0]  60.2,131.57 0 top
U$181  [RESET0]  52.7,131.57 0 top
U$182  [#_GND#0]  50.04,100.08 90 top
U$183  [#ZAPPER_SENSOR_#0]  24.64,102.49 270 bottom
U$184  [#ZAPPER_TRIGGER_#0]  27.18,102.49 270 bottom
U$185  [#B_BUTTON_#0]  29.72,102.49 270 bottom
U$186  [#A_BUTTON_#0]  32.26,102.49 270 bottom
U$187  [#SELECT_BUTTON_#0]  34.8,102.49 270 bottom
U$188  [#START_BUTTON_#0]  37.34,102.49 270 bottom
U$189  [#D#PAD_RIGHT_#0]  39.88,102.49 270 bottom
U$190  [#D#PAD_LEFT_#0]  42.42,102.49 270 bottom
U$191  [#D#PAD_DOWN_#0]  44.96,102.49 270 bottom
U$192  [#D#PAD_UP_#0]  47.5,102.49 270 bottom
U$193  [#GND_#0]  50.04,99.7 270 bottom
U$194  [#SDA_#0]  55.12,99.7 270 bottom
U$195  [#SCL_#0]  57.66,99.7 270 bottom
U$196  [#3#3V_#0]  52.58,99.7 270 bottom
U$197  [#I�C#0]  34.54,127.38 270 bottom
U$198  [SPARKX-TINY]  19.94,125.6 180 bottom
U$199  [QWIICNESS#PNG]  36.07,135.13 180 bottom
U$200  [QWIICNES0]  36.07,118.36 0 top
U$201  [CONTROLLER_INTERFACE0]  35.94,116.97 0 top
U$202  [SPARKX-SMALL]  36.07,120.4 0 top
U$203  [STAND-OFF-TIGHT]  61.47,136.4 0 top
U$204  [QWIIC_5MM]  60.2,109.73 0 top
U$205  [#LED#0]  58.55,128.78 270 bottom
U$206  [STAND-OFF-TIGHT]  67.06,100.84 0 top
U$207  [STAND-OFF-TIGHT]  119.13,100.84 0 top
U$208  [#LIGHT#0]  82.3,102.74 90 top
U$209  [#TRIG#0]  84.84,102.74 90 top
U$210  [#B#0]  87.38,102.74 90 top
U$211  [#A#0]  89.92,102.74 90 top
U$212  [#SELECT#0]  92.46,102.74 90 top
U$213  [#START#0]  95,102.74 90 top
U$214  [#RIGHT#0]  97.54,102.74 90 top
U$215  [#LEFT#0]  100.08,102.74 90 top
U$216  [#DOWN#0]  102.62,102.74 90 top
U$217  [#UP#0]  105.16,102.74 90 top
U$218  [#_SDA#0]  112.78,100.08 90 top
U$219  [#_SCL#0]  115.32,100.08 90 top
U$220  [#_3#3V#0]  110.24,100.08 90 top
U$221  [PWR0]  117.86,131.57 0 top
U$222  [RESET0]  110.36,131.57 0 top
U$223  [#_GND#0]  107.7,100.08 90 top
U$224  [#ZAPPER_SENSOR_#0]  82.3,102.49 270 bottom
U$225  [#ZAPPER_TRIGGER_#0]  84.84,102.49 270 bottom
U$226  [#B_BUTTON_#0]  87.38,102.49 270 bottom
U$227  [#A_BUTTON_#0]  89.92,102.49 270 bottom
U$228  [#SELECT_BUTTON_#0]  92.46,102.49 270 bottom
U$229  [#START_BUTTON_#0]  95,102.49 270 bottom
U$230  [#D#PAD_RIGHT_#0]  97.54,102.49 270 bottom
U$231  [#D#PAD_LEFT_#0]  100.08,102.49 270 bottom
U$232  [#D#PAD_DOWN_#0]  102.62,102.49 270 bottom
U$233  [#D#PAD_UP_#0]  105.16,102.49 270 bottom
U$234  [#GND_#0]  107.7,99.7 270 bottom
U$235  [#SDA_#0]  112.78,99.7 270 bottom
U$236  [#SCL_#0]  115.32,99.7 270 bottom
U$237  [#3#3V_#0]  110.24,99.7 270 bottom
U$238  [#I�C#0]  92.2,127.38 270 bottom
U$239  [SPARKX-TINY]  77.6,125.6 180 bottom
U$240  [QWIICNESS#PNG]  93.73,135.13 180 bottom
U$241  [QWIICNES0]  93.73,118.36 0 top
U$242  [CONTROLLER_INTERFACE0]  93.6,116.97 0 top
U$243  [SPARKX-SMALL]  93.73,120.4 0 top
U$244  [STAND-OFF-TIGHT]  119.13,136.4 0 top
U$245  [QWIIC_5MM]  117.86,109.73 0 top
U$246  [#LED#0]  116.2,128.78 270 bottom
Y1  16MHz  [CRYSTAL-SMD-2.0X1.6MM]  44.96,44.2 180 top
Y2  16MHz  [CRYSTAL-SMD-2.0X1.6MM]  102.62,44.2 180 top
Y3  16MHz  [CRYSTAL-SMD-2.0X1.6MM]  44.96,88.39 180 top
Y4  16MHz  [CRYSTAL-SMD-2.0X1.6MM]  102.62,88.39 180 top
Y5  16MHz  [CRYSTAL-SMD-2.0X1.6MM]  44.96,132.59 180 top
Y6  16MHz  [CRYSTAL-SMD-2.0X1.6MM]  102.62,132.59 180 top

## Library data of the parts
C1 C3 C17 C18 C26 C27 C35 C36 C44 C45 C53 C54 = SparkFun-Capacitors; PROD_ID: CAP-07876
C2 C4 C7 C8 C19 C20 C28 C29 C37 C38 C46 C47 = SparkFun-Capacitors; PROD_ID: CAP-11015
C5 C6 C15 C16 C24 C25 C33 C34 C42 C43 C51 C52 = SparkFun-Capacitors; PROD_ID: CAP-00810
C9-C14 C21-C23 C30-C32 C39-C41 C48-C50 = SparkFun-Capacitors; PROD_ID: CAP-00868
D1-D11 D13-D19 D21-D30 D32-D41 D43-D52 D54-D63 D65 D66 = SparkFun-LED; PROD_ID: DIO-00821
D12 D20 D31 D42 D53 D64 = SparkFun-DiscreteSemi; PROD_ID: DIO-14072
E$1-E$4 U$41 U$81 U$122 U$163 U$204 U$245 = SparkFun-Aesthetics
E$5 E$6 = SparkFun-Retired
F1-F6 = SparkFun-Fuses; PROD_ID: RES-13945
J1 J2 J9 J11 J16 J18 J23 J25 J30 J32 J37 J39 = SparkFun-Connectors; PROD_ID: CONN-13694
J3 J13 J20 J27 J34 J41 = SparkFun-Connectors; PROD_ID: CONN-09696
J4 J6 J12 J14 J19 J21 J26 J28 J33 J35 J40 J42 = SparkFun-Connectors
J5 J10 J17 J24 J31 J38 = USBC
J7 J8 J15 J22 J29 J36 = NES
JP1-JP12 = SparkFun-Jumpers
LED1-LED6 = SparkFun-LED; PROD_ID: DIO-00819
R1-R10 R15 R19-R28 R35 R37-R46 R53 R55-R64 R71 R73-R82 R89 R91-R100 R107 = SparkFun-Resistors; PROD_ID: RES-07856
R11 R12 R29 R30 R47 R48 R65 R66 R83 R84 R101 R102 = SparkFun-Resistors; PROD_ID: RES-08698
R13 R16 R31 R32 R49 R50 R67 R68 R85 R86 R103 R104 = SparkFun-Resistors; PROD_ID: RES-12083
R14 R36 R54 R72 R90 R108 = SparkFun-Resistors; PROD_ID: RES-00824
R17 R18 R33 R34 R51 R52 R69 R70 R87 R88 R105 R106 = SparkFun-Resistors; PROD_ID: RES-08272
S1-S6 = SparkFun-Switches; PROD_ID: SWCH-14139
U1 U3 U5 U7 U9 U11 = SparkFun-IC-Microcontroller; PROD_ID: IC-10828
U2 U4 U6 U8 U10 U12 = SparkFun-IC-Power; PROD_ID: VREG-12457
U$1 U$3 U$38 U$42 U$43 U$80 U$83 U$84 U$121 U$124 U$125 U$162 U$165 U$166 U$203 U$206 U$207 U$244 = SparkFun-Hardware
U$2 U$20 U$75 U$79 U$116 U$120 U$157 U$161 U$198 U$202 U$239 U$243 = SparkX
U$4-U$19 U$21-U$36 U$39 U$40 U$44-U$74 U$77 U$78 U$82 U$85-U$115 U$118 U$119 U$123 U$126-U$156 U$159 U$160 U$164 U$167-U$197 U$200 U$201 U$205 U$208-U$238 U$241 U$242 U$246 = output
U$37 U$76 U$117 U$158 U$199 U$240 = qwiicness#PNG
Y1-Y6 = SparkFun-Clocks; PROD_ID: XTAL-14681

## Nets
3.3V: C6.1 C8.2 C11.1 J1.2 J2.2 J3.2 J6.2 J7.7 JP1.2 R14.2 R19.2 U2.5 U3.14 U3.24 U3.34 U3.44
3.3V1: C4.2 C13.1 C16.1 J8.7 J9.2 J11.2 J13.2 J14.2 JP3.2 R35.2 R36.2 U1.14 U1.24 U1.34 U1.44 U4.5
3.3V2: C20.2 C22.1 C25.1 J15.7 J16.2 J18.2 J20.2 J21.2 JP5.2 R53.2 R54.2 U5.14 U5.24 U5.34 U5.44 U6.5
3.3V3: C29.2 C31.1 C34.1 J22.7 J23.2 J25.2 J27.2 J28.2 JP7.2 R71.2 R72.2 U7.14 U7.24 U7.34 U7.44 U8.5
3.3V4: C38.2 C40.1 C43.1 J29.7 J30.2 J32.2 J34.2 J35.2 JP9.2 R89.2 R90.2 U9.14 U9.24 U9.34 U9.44 U10.5
3.3V5: C47.2 C49.1 C52.1 J36.7 J37.2 J39.2 J41.2 J42.2 JP11.2 R107.2 R108.2 U11.14 U11.24 U11.34 U11.44 U12.5
5V [vcc]: C7.2 D12.C U2.1 U2.3
5V1 [vcc]: C2.2 D20.C U4.1 U4.3
5V2 [vcc]: C19.2 D31.C U6.1 U6.3
5V3 [vcc]: C28.2 D42.C U8.1 U8.3
5V4 [vcc]: C37.2 D53.C U10.1 U10.3
5V5 [vcc]: C46.2 D64.C U12.1 U12.3
!RESET: J6.5 R14.1 S2.3 U3.13
!RESET1: J14.5 R36.1 S1.3 U1.13
!RESET2: J21.5 R54.1 S3.3 U5.13
!RESET3: J28.5 R72.1 S4.3 U7.13
!RESET4: J35.5 R90.1 S5.3 U9.13
!RESET5: J42.5 R108.1 S6.3 U11.13
A_LED: J4.13 R6.2 U3.32
A_LED1: J12.13 R25.2 U1.32
A_LED2: J19.13 R43.2 U5.32
A_LED3: J26.13 R61.2 U7.32
A_LED4: J33.13 R79.2 U9.32
A_LED5: J40.13 R97.2 U11.32
AREF: C5.1 U3.42
AREF1: C15.1 U1.42
AREF2: C24.1 U5.42
AREF3: C33.1 U7.42
AREF4: C42.1 U9.42
AREF5: C51.1 U11.42
B_LED: J4.15 R7.2 U3.31
B_LED1: J12.15 R26.2 U1.31
B_LED2: J19.15 R44.2 U5.31
B_LED3: J26.15 R62.2 U7.31
B_LED4: J33.15 R80.2 U9.31
B_LED5: J40.15 R98.2 U11.31
D-_HV: J5.A7 J5.B7 R12.1
D-_HV1: J10.A7 J10.B7 R30.1
D-_HV2: J17.A7 J17.B7 R48.1
D-_HV3: J24.A7 J24.B7 R66.1
D-_HV4: J31.A7 J31.B7 R84.1
D-_HV5: J38.A7 J38.B7 R102.1
D_N: R12.2 U3.3
D_N1: R30.2 U1.3
D_N2: R48.2 U5.3
D_N3: R66.2 U7.3
D_N4: R84.2 U9.3
D_N5: R102.2 U11.3
D_P: R11.2 U3.4
D_P1: R29.2 U1.4
D_P2: R47.2 U5.4
D_P3: R65.2 U7.4
D_P4: R83.2 U9.4
D_P5: R101.2 U11.4
DI: J6.1 U3.11
DI1: J14.1 U1.11
DI2: J21.1 U5.11
DI3: J28.1 U7.11
DI4: J35.1 U9.11
DI5: J42.1 U11.11
DN_LED: J4.3 R1.2 U3.40
DN_LED1: J12.3 R20.2 U1.40
DN_LED2: J19.3 R38.2 U5.40
DN_LED3: J26.3 R56.2 U7.40
DN_LED4: J33.3 R74.2 U9.40
DN_LED5: J40.3 R92.2 U11.40
DO: J6.4 U3.10
DO1: J14.4 U1.10
DO2: J21.4 U5.10
DO3: J28.4 U7.10
DO4: J35.4 U9.10
DO5: J42.4 U11.10
DP_HV: J5.A6 J5.B6 R11.1
DP_HV1: J10.A6 J10.B6 R29.1
DP_HV2: J17.A6 J17.B6 R47.1
DP_HV3: J24.A6 J24.B6 R65.1
DP_HV4: J31.A6 J31.B6 R83.1
DP_HV5: J38.A6 J38.B6 R101.1
GND: C1.1 C3.1 C5.2 C6.2 C7.1 C8.1 C9.2 C11.2 C12.2 D1.C D2.C D3.C D4.C D5.C D6.C D7.C D8.C D9.C D10.C J1.1 J2.1 J3.1 J4.2 J4.4 J4.6 J4.8 J4.10 J4.12 J4.14 J4.16 J4.18 J4.20 J5.GND J5.GND2 J6.6 J7.1 LED1.C R13.2 R16.2 S2.1 U2.2 U3.5 U3.15 U3.23 U3.33 U3.35 U3.43
GND1: C2.1 C4.1 C10.2 C13.2 C14.2 C15.2 C16.2 C17.1 C18.1 D11.C D13.C D14.C D15.C D16.C D17.C D18.C D19.C D21.C D22.C J8.1 J9.1 J10.GND J10.GND2 J11.1 J12.2 J12.4 J12.6 J12.8 J12.10 J12.12 J12.14 J12.16 J12.18 J12.20 J13.1 J14.6 LED2.C R31.2 R32.2 S1.1 U1.5 U1.15 U1.23 U1.33 U1.35 U1.43 U4.2
GND2: C19.1 C20.1 C21.2 C22.2 C23.2 C24.2 C25.2 C26.1 C27.1 D23.C D24.C D25.C D26.C D27.C D28.C D29.C D30.C D32.C D33.C J15.1 J16.1 J17.GND J17.GND2 J18.1 J19.2 J19.4 J19.6 J19.8 J19.10 J19.12 J19.14 J19.16 J19.18 J19.20 J20.1 J21.6 LED3.C R49.2 R50.2 S3.1 U5.5 U5.15 U5.23 U5.33 U5.35 U5.43 U6.2
GND3: C28.1 C29.1 C30.2 C31.2 C32.2 C33.2 C34.2 C35.1 C36.1 D34.C D35.C D36.C D37.C D38.C D39.C D40.C D41.C D43.C D44.C J22.1 J23.1 J24.GND J24.GND2 J25.1 J26.2 J26.4 J26.6 J26.8 J26.10 J26.12 J26.14 J26.16 J26.18 J26.20 J27.1 J28.6 LED4.C R67.2 R68.2 S4.1 U7.5 U7.15 U7.23 U7.33 U7.35 U7.43 U8.2
GND4: C37.1 C38.1 C39.2 C40.2 C41.2 C42.2 C43.2 C44.1 C45.1 D45.C D46.C D47.C D48.C D49.C D50.C D51.C D52.C D54.C D55.C J29.1 J30.1 J31.GND J31.GND2 J32.1 J33.2 J33.4 J33.6 J33.8 J33.10 J33.12 J33.14 J33.16 J33.18 J33.20 J34.1 J35.6 LED5.C R85.2 R86.2 S5.1 U9.5 U9.15 U9.23 U9.33 U9.35 U9.43 U10.2
GND5: C46.1 C47.1 C48.2 C49.2 C50.2 C51.2 C52.2 C53.1 C54.1 D56.C D57.C D58.C D59.C D60.C D61.C D62.C D63.C D65.C D66.C J36.1 J37.1 J38.GND J38.GND2 J39.1 J40.2 J40.4 J40.6 J40.8 J40.10 J40.12 J40.14 J40.16 J40.18 J40.20 J41.1 J42.6 LED6.C R103.2 R104.2 S6.1 U11.5 U11.15 U11.23 U11.33 U11.35 U11.43 U12.2
LF_LED: J4.5 R2.2 U3.39
LF_LED1: J12.5 R21.2 U1.39
LF_LED2: J19.5 R39.2 U5.39
LF_LED3: J26.5 R57.2 U7.39
LF_LED4: J33.5 R75.2 U9.39
LF_LED5: J40.5 R93.2 U11.39
N$1: C3.2 U3.16 Y1.1
N$2: C1.2 U3.17 Y1.3
N$3: D1.A R10.1
N$4: D2.A R1.1
N$5: D3.A R2.1
N$6: D4.A R3.1
N$7: D5.A R4.1
N$8: D6.A R5.1
N$9: J5.A5 R13.1
N$10: J5.B5 R16.1
N$11: D8.A R7.1
N$12: D7.A R6.1
N$13: JP2.2 R19.1
N$14: JP2.1 LED1.A
N$15: C18.2 U1.16 Y2.1
N$16: C17.2 U1.17 Y2.3
N$17: J10.A5 R31.1
N$18: J10.B5 R32.1
N$19: D11.A R15.1
N$20: D13.A R20.1
N$21: JP1.3 R17.2
N$22: JP1.1 R18.2
N$23: D10.A R9.1
N$24: D9.A R8.1
N$25: D14.A R21.1
N$26: D15.A R22.1
N$27: D16.A R23.1
N$28: D17.A R24.1
N$29: D19.A R26.1
N$30: D18.A R25.1
N$31: JP3.3 R33.2
N$32: JP3.1 R34.2
N$33: D22.A R28.1
N$34: D21.A R27.1
N$35: JP4.2 R35.1
N$36: JP4.1 LED2.A
N$37: C27.2 U5.16 Y3.1
N$38: C26.2 U5.17 Y3.3
N$39: J17.A5 R49.1
N$40: J17.B5 R50.1
N$41: D23.A R37.1
N$42: D24.A R38.1
N$43: D25.A R39.1
N$44: D26.A R40.1
N$45: D27.A R41.1
N$46: D28.A R42.1
N$47: D30.A R44.1
N$48: D29.A R43.1
N$49: JP5.3 R51.2
N$50: JP5.1 R52.2
N$51: D33.A R46.1
N$52: D32.A R45.1
N$53: JP6.2 R53.1
N$54: JP6.1 LED3.A
N$55: C36.2 U7.16 Y4.1
N$56: C35.2 U7.17 Y4.3
N$57: J24.A5 R67.1
N$58: J24.B5 R68.1
N$59: D34.A R55.1
N$60: D35.A R56.1
N$61: D36.A R57.1
N$62: D37.A R58.1
N$63: D38.A R59.1
N$64: D39.A R60.1
N$65: D41.A R62.1
N$66: D40.A R61.1
N$67: JP7.3 R69.2
N$68: JP7.1 R70.2
N$69: D44.A R64.1
N$70: D43.A R63.1
N$71: JP8.2 R71.1
N$72: JP8.1 LED4.A
N$73: C45.2 U9.16 Y5.1
N$74: C44.2 U9.17 Y5.3
N$75: J31.A5 R85.1
N$76: J31.B5 R86.1
N$77: D45.A R73.1
N$78: D46.A R74.1
N$79: D47.A R75.1
N$80: D48.A R76.1
N$81: D49.A R77.1
N$82: D50.A R78.1
N$83: D52.A R80.1
N$84: D51.A R79.1
N$85: JP9.3 R87.2
N$86: JP9.1 R88.2
N$87: D55.A R82.1
N$88: D54.A R81.1
N$89: JP10.2 R89.1
N$90: JP10.1 LED5.A
N$91: C54.2 U11.16 Y6.1
N$92: C53.2 U11.17 Y6.3
N$93: J38.A5 R103.1
N$94: J38.B5 R104.1
N$95: D56.A R91.1
N$96: D57.A R92.1
N$97: D58.A R93.1
N$98: D59.A R94.1
N$99: D60.A R95.1
N$100: D61.A R96.1
N$101: D63.A R98.1
N$102: D62.A R97.1
N$103: JP11.3 R105.2
N$104: JP11.1 R106.2
N$105: D66.A R100.1
N$106: D65.A R99.1
N$107: JP12.2 R107.1
N$108: JP12.1 LED6.A
NES_CLK: J7.2 U3.12
NES_CLK1: J8.2 U1.12
NES_CLK2: J15.2 U5.12
NES_CLK3: J22.2 U7.12
NES_CLK4: J29.2 U9.12
NES_CLK5: J36.2 U11.12
NES_DATA: J7.4 U3.28
NES_DATA1: J8.4 U1.28
NES_DATA2: J15.4 U5.28
NES_DATA3: J22.4 U7.28
NES_DATA4: J29.4 U9.28
NES_DATA5: J36.4 U11.28
NES_LATCH: J7.3 U3.26
NES_LATCH1: J8.3 U1.26
NES_LATCH2: J15.3 U5.26
NES_LATCH3: J22.3 U7.26
NES_LATCH4: J29.3 U9.26
NES_LATCH5: J36.3 U11.26
RT_LED: J4.7 R3.2 U3.38
RT_LED1: J12.7 R22.2 U1.38
RT_LED2: J19.7 R40.2 U5.38
RT_LED3: J26.7 R58.2 U7.38
RT_LED4: J33.7 R76.2 U9.38
RT_LED5: J40.7 R94.2 U11.38
RXI: U3.20
RXI1: U1.20
RXI2: U5.20
RXI3: U7.20
RXI4: U9.20
RXI5: U11.20
SCK: J6.3 U3.9
SCK1: J14.3 U1.9
SCK2: J21.3 U5.9
SCK3: J28.3 U7.9
SCK4: J35.3 U9.9
SCK5: J42.3 U11.9
SCL: J1.4 J2.4 J3.4 R17.1 U3.18
SCL1: J9.4 J11.4 J13.4 R33.1 U1.18
SCL2: J16.4 J18.4 J20.4 R51.1 U5.18
SCL3: J23.4 J25.4 J27.4 R69.1 U7.18
SCL4: J30.4 J32.4 J34.4 R87.1 U9.18
SCL5: J37.4 J39.4 J41.4 R105.1 U11.18
SDA: J1.3 J2.3 J3.3 R18.1 U3.19
SDA1: J9.3 J11.3 J13.3 R34.1 U1.19
SDA2: J16.3 J18.3 J20.3 R52.1 U5.19
SDA3: J23.3 J25.3 J27.3 R70.1 U7.19
SDA4: J30.3 J32.3 J34.3 R88.1 U9.19
SDA5: J37.3 J39.3 J41.3 R106.1 U11.19
SELECT_LED: J4.11 R5.2 U3.36
SELECT_LED1: J12.11 R24.2 U1.36
SELECT_LED2: J19.11 R42.2 U5.36
SELECT_LED3: J26.11 R60.2 U7.36
SELECT_LED4: J33.11 R78.2 U9.36
SELECT_LED5: J40.11 R96.2 U11.36
START_LED: J4.9 R4.2 U3.37
START_LED1: J12.9 R23.2 U1.37
START_LED2: J19.9 R41.2 U5.37
START_LED3: J26.9 R59.2 U7.37
START_LED4: J33.9 R77.2 U9.37
START_LED5: J40.9 R95.2 U11.37
TXO: U3.21
TXO1: U1.21
TXO2: U5.21
TXO3: U7.21
TXO4: U9.21
TXO5: U11.21
UCAP: C12.1 U3.6
UCAP1: C14.1 U1.6
UCAP2: C23.1 U5.6
UCAP3: C32.1 U7.6
UCAP4: C41.1 U9.6
UCAP5: C50.1 U11.6
UP_LED: J4.1 R10.2 U3.41
UP_LED1: J12.1 R15.2 U1.41
UP_LED2: J19.1 R37.2 U5.41
UP_LED3: J26.1 R55.2 U7.41
UP_LED4: J33.1 R73.2 U9.41
UP_LED5: J40.1 R91.2 U11.41
USB_RAW: D12.A F1.2
USB_RAW1: D20.A F2.2
USB_RAW2: D31.A F3.2
USB_RAW3: D42.A F4.2
USB_RAW4: D53.A F5.2
USB_RAW5: D64.A F6.2
V_USB: C9.1 F1.1 J5.VBUS1 J5.VBUS2 U3.2 U3.7
V_USB1: C10.1 F2.1 J10.VBUS1 J10.VBUS2 U1.2 U1.7
V_USB2: C21.1 F3.1 J17.VBUS1 J17.VBUS2 U5.2 U5.7
V_USB3: C30.1 F4.1 J24.VBUS1 J24.VBUS2 U7.2 U7.7
V_USB4: C39.1 F5.1 J31.VBUS1 J31.VBUS2 U9.2 U9.7
V_USB5: C48.1 F6.1 J38.VBUS1 J38.VBUS2 U11.2 U11.7
ZAP_LIGHT: J7.6 U3.25
ZAP_LIGHT1: J8.6 U1.25
ZAP_LIGHT2: J15.6 U5.25
ZAP_LIGHT3: J22.6 U7.25
ZAP_LIGHT4: J29.6 U9.25
ZAP_LIGHT5: J36.6 U11.25
ZAP_LIGHT_LED: J4.19 R9.2 U3.29
ZAP_LIGHT_LED1: J12.19 R28.2 U1.29
ZAP_LIGHT_LED2: J19.19 R46.2 U5.29
ZAP_LIGHT_LED3: J26.19 R64.2 U7.29
ZAP_LIGHT_LED4: J33.19 R82.2 U9.29
ZAP_LIGHT_LED5: J40.19 R100.2 U11.29
ZAP_TRIG_LED: J4.17 R8.2 U3.30
ZAP_TRIG_LED1: J12.17 R27.2 U1.30
ZAP_TRIG_LED2: J19.17 R45.2 U5.30
ZAP_TRIG_LED3: J26.17 R63.2 U7.30
ZAP_TRIG_LED4: J33.17 R81.2 U9.30
ZAP_TRIG_LED5: J40.17 R99.2 U11.30
ZAP_TRIGGER: J7.5 U3.27
ZAP_TRIGGER1: J8.5 U1.27
ZAP_TRIGGER2: J15.5 U5.27
ZAP_TRIGGER3: J22.5 U7.27
ZAP_TRIGGER4: J29.5 U9.27
ZAP_TRIGGER5: J36.5 U11.27